# EAGLE board PICkit3 Extender (EAGLE 6.3)
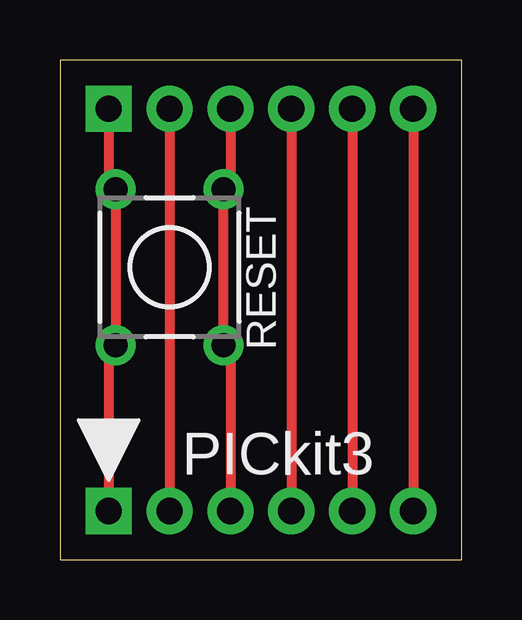
[diagram p0: board, top side]

Size 16.76 x 20.83 mm. Coordinates in mm from the lower left corner, seen from the top.
Outline: 0,0 16.76,0 16.76,20.83 0,20.83 0,0
Copper layers (1*16): Top 0.035mm / dielectric 1.5mm / Bottom 0.035mm
Design rules "default": minimum track width 10mil, minimum drill 24mil, track to track 8mil, track to pad 8mil, pad to pad 8mil, via to via 8mil, smd to smd 8mil, copper to edge 40mil, drill to drill 8mil, minimum pad ring 10mil, minimum via ring 8mil, stop-mask expansion 4mil, vias tented up to drill 0mil, thermal gap 10mil

## Footprints (pad centres in the part's own frame; a part is rotated, then mirrored left to right if it is on the bottom)
TL1105 = drill 1 pad 1.676: 1 -2.25,3.25; 2 2.25,3.25; 3 -2.25,-3.25; 4 2.25,-3.25
PINS_6_PICKIT3 = drill 1.1 pad 1.93 square: 1 0,0 | drill 1.1 pad 1.93: 2 0,-2.54; 3 0,-5.08; 4 0,-7.62; 5 0,-10.16; 6 0,-12.7
PINS_6 = drill 1.1 pad 1.93 square: 1 0,0 | drill 1.1 pad 1.93: 2 2.54,0; 3 5.08,0; 4 7.62,0; 5 10.16,0; 6 12.7,0

## Placement (x,y rotation side)
RESET  [TL1105]  4.57,12.19 180 top
U$1  PICKIT3  [PINS_6_PICKIT3]  2.03,2.03 90 top
U$3  PICKIT3PLAIN  [PINS_6]  2.03,18.8 0 top

## Library data of the parts
RESET U$1 U$3 = nolan-utsa

## Nets
N$1: RESET.2 RESET.4 U$1.1 U$3.1
N$2: U$1.2 U$3.2
N$3: RESET.1 RESET.3 U$1.3 U$3.3
N$4: U$1.4 U$3.4
N$5: U$1.5 U$3.5
N$6: U$1.6 U$3.6

## Tracks (layer width: path | path; a pad name or v marks a point on that pad's centre or on a via)
N$1
  Top 0.406: U$3.1 2.03,15.73 RESET.4 RESET.2 2.03,8.65 U$1.1
N$2
  Top 0.406: U$3.2 U$1.2
N$3
  Top 0.406: U$3.3 7.11,15.73 RESET.3 RESET.1 7.11,8.65 U$1.3
N$4
  Top 0.406: U$3.4 U$1.4
N$5
  Top 0.406: U$3.5 U$1.5
N$6
  Top 0.406: U$3.6 U$1.6

## Text on the board
tPlace: PICkit3